# EAGLE board GNSS_Chip_Antenna_Evaluation_Board-Panel (EAGLE 9.3.0)
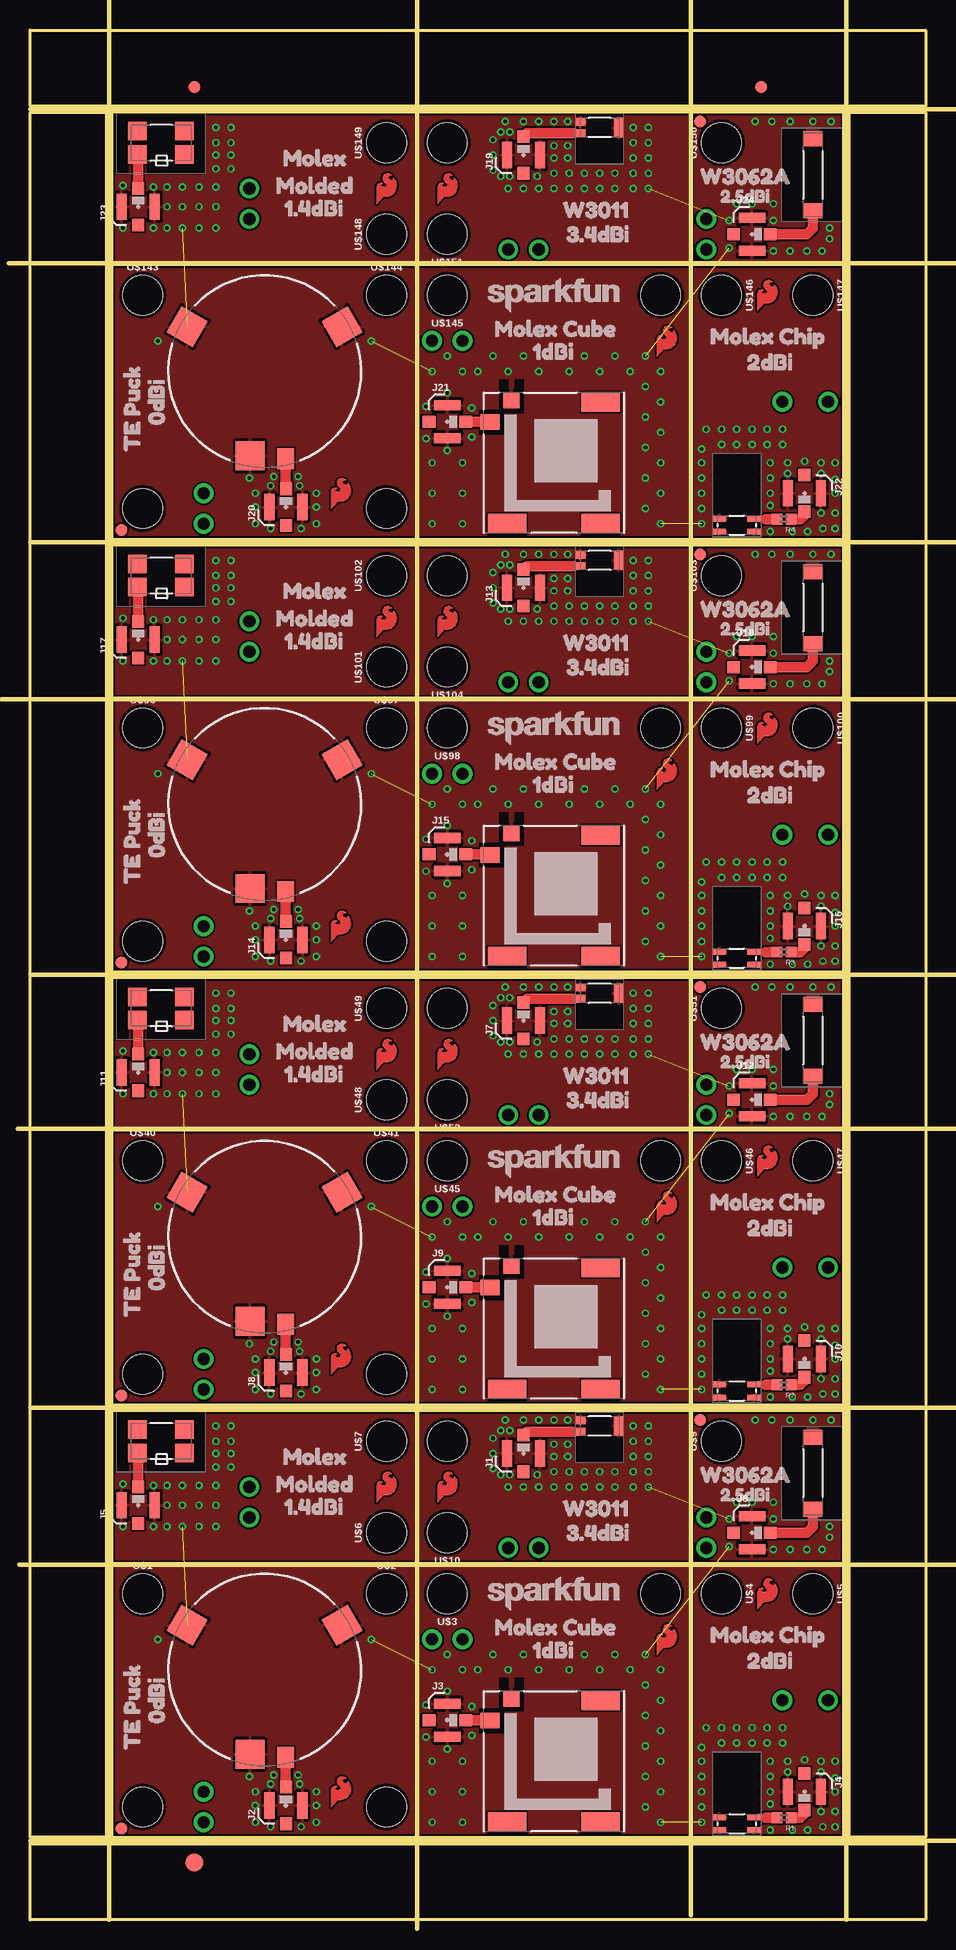
[diagram p0: board, top side]
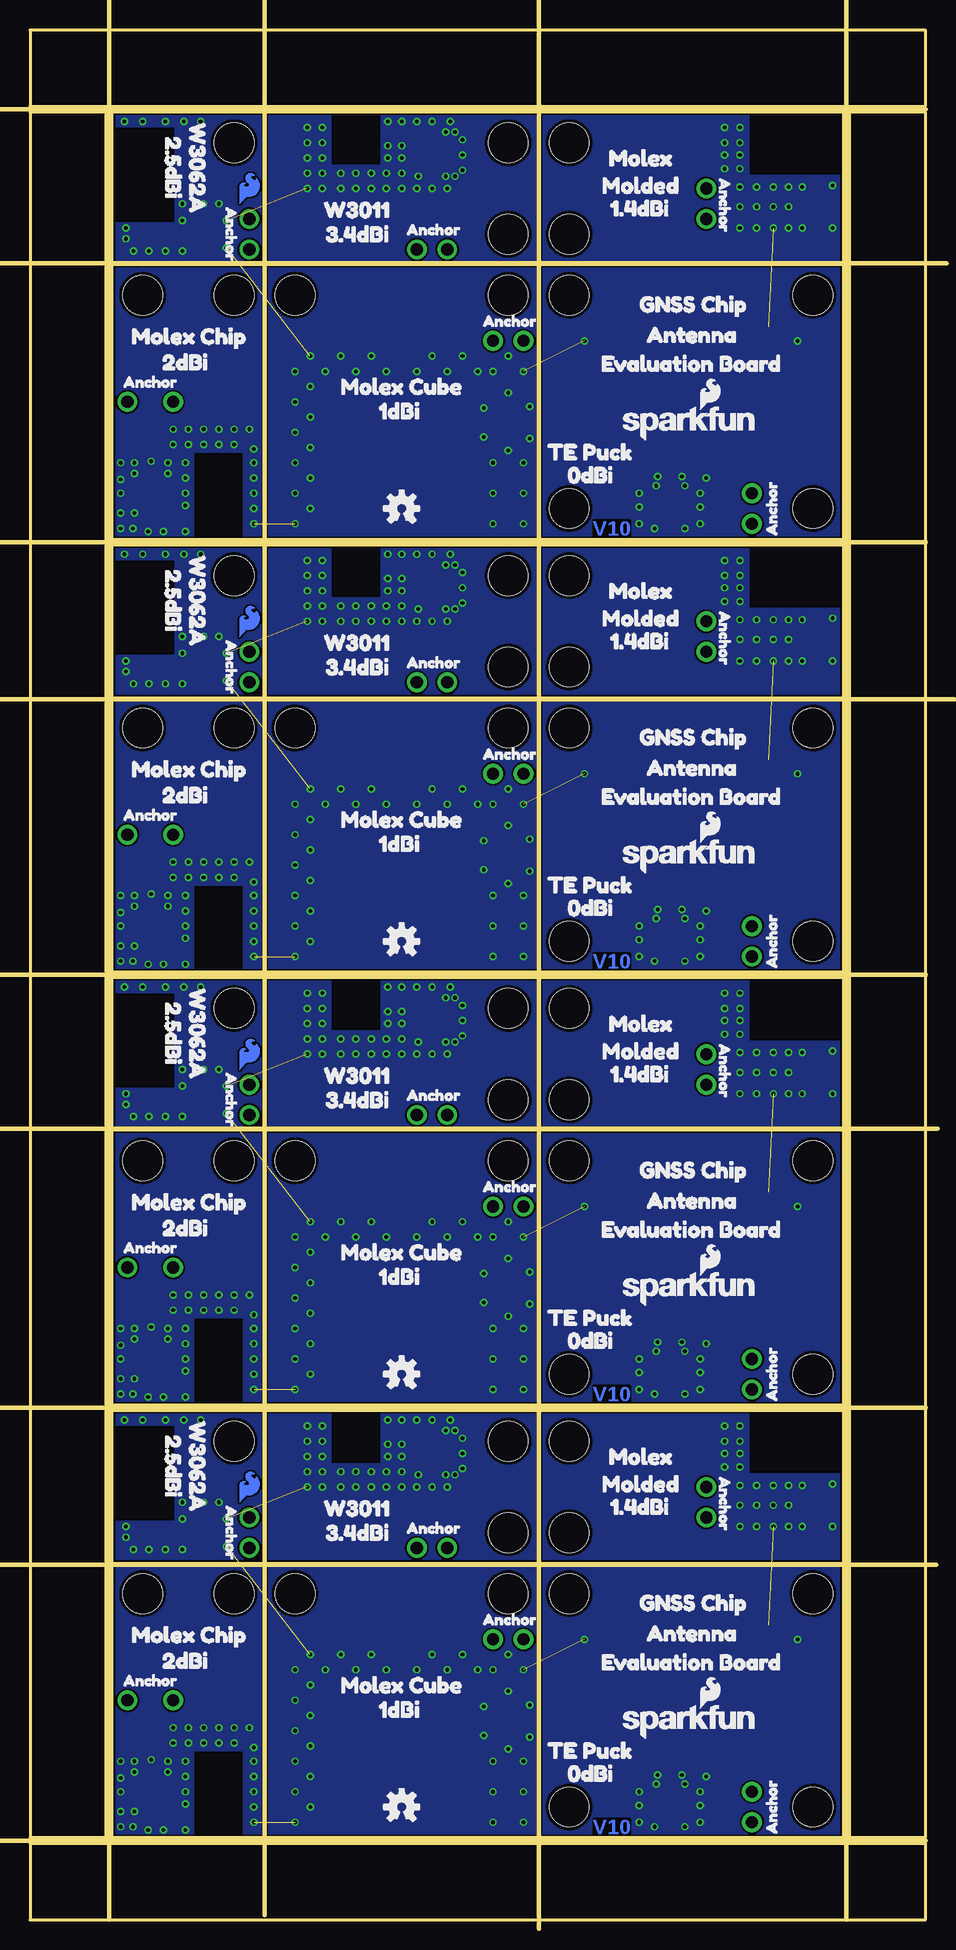
[diagram p1: board, bottom side, seen from below]

Size 74.68 x 157.48 mm. Coordinates in mm from the lower left corner, seen from the top.
Outline: 32.26,42.42 32.26,6.86
Outline: 55.12,42.42 55.12,6.86
Outline: 6.86,29.72 67.82,29.72
Outline: 32.26,78.49 32.26,42.93
Outline: 55.12,78.49 55.12,42.93
Outline: 6.86,65.79 67.82,65.79
Outline: 32.26,114.55 32.26,78.99
Outline: 55.12,114.55 55.12,78.99
Outline: 6.86,101.85 67.82,101.85
Outline: 32.26,150.62 32.26,115.06
Outline: 55.12,150.62 55.12,115.06
Outline: 6.86,137.92 67.82,137.92
Outline: 6.86,42.42 67.82,42.42 67.82,6.86 6.86,6.86 6.86,42.42
Outline: 6.86,78.49 67.82,78.49 67.82,42.93 6.86,42.93 6.86,78.49
Outline: 6.86,114.55 67.82,114.55 67.82,78.99 6.86,78.99 6.86,114.55
Outline: 6.86,150.62 67.82,150.62 67.82,115.06 6.86,115.06 6.86,150.62
Outline: 0,6.35 74.68,6.35 74.68,0 0,0 0,6.35
Outline: 68.33,150.62 74.68,150.62 74.68,6.86 68.33,6.86 68.33,150.62
Outline: 0,157.48 74.68,157.48 74.68,151.13 0,151.13 0,157.48
Outline: 0,150.62 6.35,150.62 6.35,6.86 0,6.86 0,150.62
Copper layers (1*16): Top 0.035mm / dielectric 1.5mm / Bottom 0.035mm
Design rules "SparkFun-2-layer-PCBWay-LIMIT": minimum track width 6mil, minimum drill 0.3mm, track to track 6mil, track to pad 6mil, pad to pad 6mil, via to via 6mil, smd to smd 6mil, copper to edge 6mil, drill to drill 6mil, minimum pad ring 6mil, minimum via ring 6mil, stop-mask expansion 4mil, vias tented up to drill 25mil, thermal gap 10mil
Milling: 13 lines

## Footprints (pad centres in the part's own frame; a part is rotated, then mirrored left to right if it is on the bottom)
FIDUCIAL-1X2 = smd 1 x 1: 1 0,0
FIDUCIAL-1.5X3 = smd 1.5 x 1.5: 1 0,0
U.FL = smd 2.2 x 0.85: 1 0,1.375; 2 0,-1.375 | smd 1.05 x 1: FEED 1.525,0; NC -1.525,0
STAND-OFF = hole 3.302: 0,0
0402 = smd 0.85 x 0.9: 1 -0.58,0; 2 0.58,0
TE_PUCK = smd 2.4 x 2.4: 1 -1.2,-7.03 | smd 2.5 x 2.5 rotated 60: 2 -6.443,3.72 | smd 2.5 x 2.5 rotated 300: 3 6.443,3.72 | smd 1.4 x 1.74: S 1.75,-7.28
MOLEX_GNSS_CUBE = smd 1.61 x 1.3: FEED 5.33,-3.4 | smd 1.3 x 1.32: GND 3.545,-5.2 | smd 3.2 x 1.6: NC1 -3.905,-5.06; NC2 -3.905,5.06; NC3 3.905,5.06
MOLEX_GNSS_CHIP = smd 1.1 x 0.5: 1 1.45,-0.55; 2 -1.45,-0.55; 3 -1.45,0.55; FEED 1.45,0.55
MLOEX_GNSS_MOLDED = smd 1.54 x 1.54: 1 -0.97,-1.95; 2 -0.97,1.95; 3 0.97,1.95; FEED 0.97,-1.95
W3062A = smd 1.25 x 1.61: FEED 3,0; GND -3,0
W3011 = smd 0.8 x 0.65: 1 1.6,0.475; 2 1.6,-0.475 | smd 0.8 x 1.6: 3 -1.6,0

## Placement (x,y rotation side)
E$1  [FIDUCIAL-1X2]  13.72,152.72 0 top
E$2  [FIDUCIAL-1X2]  60.96,152.72 0 top
E$3  [FIDUCIAL-1.5X3]  13.72,4.76 0 top
J1  U.FL  [U.FL]  41.15,38.86 90 top
J2  U.FL  [U.FL]  21.34,9.52 90 top
J3  U.FL  [U.FL]  34.8,16.64 0 top
J4  U.FL  [U.FL]  64.57,10.67 270 top
J5  U.FL  [U.FL]  9.02,34.54 90 top
J6  U.FL  [U.FL]  60.2,32.26 0 top
J7  U.FL  [U.FL]  41.15,74.93 90 top
J8  U.FL  [U.FL]  21.34,45.59 90 top
J9  U.FL  [U.FL]  34.8,52.7 0 top
J10  U.FL  [U.FL]  64.57,46.74 270 top
J11  U.FL  [U.FL]  9.02,70.61 90 top
J12  U.FL  [U.FL]  60.2,68.33 0 top
J13  U.FL  [U.FL]  41.15,111 90 top
J14  U.FL  [U.FL]  21.34,81.66 90 top
J15  U.FL  [U.FL]  34.8,88.77 0 top
J16  U.FL  [U.FL]  64.57,82.8 270 top
J17  U.FL  [U.FL]  9.02,106.68 90 top
J18  U.FL  [U.FL]  60.2,104.39 0 top
J19  U.FL  [U.FL]  41.15,147.07 90 top
J20  U.FL  [U.FL]  21.34,117.73 90 top
J21  U.FL  [U.FL]  34.8,124.84 0 top
J22  U.FL  [U.FL]  64.57,118.87 270 top
J23  U.FL  [U.FL]  9.02,142.75 90 top
J24  U.FL  [U.FL]  60.2,140.46 0 top
JP1  STAND-OFF  [STAND-OFF]  29.72,9.4 0 top
JP2  STAND-OFF  [STAND-OFF]  9.4,9.4 0 top
JP3  STAND-OFF  [STAND-OFF]  52.58,63.25 180 top
JP4  STAND-OFF  [STAND-OFF]  34.8,75.95 180 top
JP5  STAND-OFF  [STAND-OFF]  52.58,27.18 180 top
JP6  STAND-OFF  [STAND-OFF]  34.8,39.88 180 top
JP7  FIDUCIAL1X2  [FIDUCIAL-1X2]  55.88,77.72 0 top
JP8  FIDUCIAL1X2  [FIDUCIAL-1X2]  55.88,41.66 0 top
JP9  FIDUCIAL1X2  [FIDUCIAL-1X2]  7.62,7.62 0 top
JP10  FIDUCIAL1X2  [FIDUCIAL-1X2]  7.62,43.69 0 top
JP11  STAND-OFF  [STAND-OFF]  29.72,45.47 0 top
JP12  STAND-OFF  [STAND-OFF]  9.4,45.47 0 top
JP13  STAND-OFF  [STAND-OFF]  52.58,99.31 180 top
JP14  STAND-OFF  [STAND-OFF]  34.8,112.01 180 top
JP15  FIDUCIAL1X2  [FIDUCIAL-1X2]  55.88,113.79 0 top
JP16  FIDUCIAL1X2  [FIDUCIAL-1X2]  7.62,79.76 0 top
JP17  STAND-OFF  [STAND-OFF]  29.72,81.53 0 top
JP18  STAND-OFF  [STAND-OFF]  9.4,81.53 0 top
JP19  STAND-OFF  [STAND-OFF]  52.58,135.38 180 top
JP20  STAND-OFF  [STAND-OFF]  34.8,148.08 180 top
JP21  FIDUCIAL1X2  [FIDUCIAL-1X2]  55.88,149.86 0 top
JP22  FIDUCIAL1X2  [FIDUCIAL-1X2]  7.62,115.82 0 top
JP23  STAND-OFF  [STAND-OFF]  29.72,117.6 0 top
JP24  STAND-OFF  [STAND-OFF]  9.4,117.6 0 top
LOGO1  SFE_LOGO_FLAME.1EXP  [SFE_LOGO_FLAME_COPPER_EXPOSED_.1]  56.39,36.07 0 bottom
LOGO2  SFE_LOGO_FLAME.1EXP  [SFE_LOGO_FLAME_COPPER_EXPOSED_.1]  61.47,27.18 0 top
LOGO3  SFE_LOGO_FLAME.1EXP  [SFE_LOGO_FLAME_COPPER_EXPOSED_.1]  34.8,36.07 0 top
LOGO4  SFE_LOGO_FLAME.1EXP  [SFE_LOGO_FLAME_COPPER_EXPOSED_.1]  29.72,36.07 0 top
LOGO5  SFE_LOGO_FLAME.1EXP  [SFE_LOGO_FLAME_COPPER_EXPOSED_.1]  53.09,23.37 0 top
LOGO6  SFE_LOGO_FLAME.1EXP  [SFE_LOGO_FLAME_COPPER_EXPOSED_.1]  25.91,10.67 0 top
LOGO7  SFE_LOGO_FLAME.1EXP  [SFE_LOGO_FLAME_COPPER_EXPOSED_.1]  56.39,72.14 0 bottom
LOGO8  SFE_LOGO_FLAME.1EXP  [SFE_LOGO_FLAME_COPPER_EXPOSED_.1]  61.47,63.25 0 top
LOGO9  SFE_LOGO_FLAME.1EXP  [SFE_LOGO_FLAME_COPPER_EXPOSED_.1]  34.8,72.14 0 top
LOGO10  SFE_LOGO_FLAME.1EXP  [SFE_LOGO_FLAME_COPPER_EXPOSED_.1]  29.72,72.14 0 top
LOGO11  SFE_LOGO_FLAME.1EXP  [SFE_LOGO_FLAME_COPPER_EXPOSED_.1]  53.09,59.44 0 top
LOGO12  SFE_LOGO_FLAME.1EXP  [SFE_LOGO_FLAME_COPPER_EXPOSED_.1]  25.91,46.74 0 top
LOGO13  SFE_LOGO_FLAME.1EXP  [SFE_LOGO_FLAME_COPPER_EXPOSED_.1]  56.39,108.2 0 bottom
LOGO14  SFE_LOGO_FLAME.1EXP  [SFE_LOGO_FLAME_COPPER_EXPOSED_.1]  61.47,99.31 0 top
LOGO15  SFE_LOGO_FLAME.1EXP  [SFE_LOGO_FLAME_COPPER_EXPOSED_.1]  34.8,108.2 0 top
LOGO16  SFE_LOGO_FLAME.1EXP  [SFE_LOGO_FLAME_COPPER_EXPOSED_.1]  29.72,108.2 0 top
LOGO17  SFE_LOGO_FLAME.1EXP  [SFE_LOGO_FLAME_COPPER_EXPOSED_.1]  53.09,95.5 0 top
LOGO18  SFE_LOGO_FLAME.1EXP  [SFE_LOGO_FLAME_COPPER_EXPOSED_.1]  25.91,82.8 0 top
LOGO19  SFE_LOGO_FLAME.1EXP  [SFE_LOGO_FLAME_COPPER_EXPOSED_.1]  56.39,144.27 0 bottom
LOGO20  SFE_LOGO_FLAME.1EXP  [SFE_LOGO_FLAME_COPPER_EXPOSED_.1]  61.47,135.38 0 top
LOGO21  SFE_LOGO_FLAME.1EXP  [SFE_LOGO_FLAME_COPPER_EXPOSED_.1]  34.8,144.27 0 top
LOGO22  SFE_LOGO_FLAME.1EXP  [SFE_LOGO_FLAME_COPPER_EXPOSED_.1]  29.72,144.27 0 top
LOGO23  SFE_LOGO_FLAME.1EXP  [SFE_LOGO_FLAME_COPPER_EXPOSED_.1]  53.09,131.57 0 top
LOGO24  SFE_LOGO_FLAME.1EXP  [SFE_LOGO_FLAME_COPPER_EXPOSED_.1]  25.91,118.87 0 top
R1  0  [0402]  62.86,8.51 180 top
R2  0  [0402]  62.86,44.58 180 top
R3  0  [0402]  62.86,80.65 180 top
R4  0  [0402]  62.86,116.71 180 top
U$1  [STAND-OFF]  9.4,27.18 0 top
U$2  [STAND-OFF]  29.72,27.18 0 top
U$3  [STAND-OFF]  34.8,27.18 180 top
U$4  [STAND-OFF]  57.66,27.18 270 top
U$5  [STAND-OFF]  65.28,27.18 270 top
U$6  [STAND-OFF]  29.72,32.26 90 top
U$7  [STAND-OFF]  29.72,39.88 90 top
U$8  [ANCHOR0]  16.76,37.72 270 bottom
U$9  [STAND-OFF]  57.66,39.88 90 top
U$10  [STAND-OFF]  34.8,32.26 180 top
U$11  [3#4DBI2]  43.56,32.26 0 top
U$12  [0DBI0]  10.54,15.24 90 top
U$13  [TE_PUCK7]  32.64,14.1 0 bottom
U$14  [1#4DBI3]  20.07,34.42 0 top
U$15  [1DBI1]  40.77,22.48 0 top
U$16  OSHW-LOGOS  [OSHW-LOGO-S]  43.69,9.4 0 bottom
U$17  OSHW-LOGOS  [OSHW-LOGO-S]  43.69,45.47 0 bottom
U$18  [2DBI2]  58.67,21.59 0 top
U$19  [MOLEX_CHIP5]  55.63,23.75 0 top
U$20  [MOLEX_CHIP5]  67.31,23.75 0 bottom
U$21  [MOLEX0]  27.56,38.61 0 bottom
U$22  [MOLEX0]  19.94,38.61 0 top
U$23  [SFE_LOGO_NAME_.1]  43.69,27.18 0 top
U$24  [ANCHOR0]  12.83,6.35 90 bottom
U$25  [ANCHOR0]  37.72,25.02 0 bottom
U$26  [ANCHOR0]  44.07,32.64 0 bottom
U$27  [ANCHOR0]  67.69,19.94 0 bottom
U$28  [ANCHOR0]  57.91,35.31 270 bottom
U$29  [MOLDED1]  19.18,36.32 0 top
U$30  [MOLDED1]  28.32,36.32 0 bottom
U$31  [MOLEX_CUBE6]  49.91,19.56 0 bottom
U$32  [1#4DBI3]  27.43,34.42 0 bottom
U$33  [W30112]  51.31,34.29 0 bottom
U$34  [3#4DBI2]  51.18,32.26 0 bottom
U$35  [W3062A3]  60.71,42.67 270 bottom
U$36  [2#5DBI4]  62.74,41.53 270 bottom
U$37  [SFE_LOGO_NAME_FLAME_.1]  19.68,16.51 0 bottom
U$38  [2DBI2]  64.77,21.59 0 bottom
U$39  [1DBI1]  46.74,17.53 0 bottom
U$40  [STAND-OFF]  9.4,63.25 0 top
U$41  [STAND-OFF]  29.72,63.25 0 top
U$42  [0DBI0]  30.99,12.19 0 bottom
U$43  [ANTENNA10]  24.38,23.88 0 bottom
U$44  [2#5DBI2]  56.64,35.43 0 top
U$45  [STAND-OFF]  34.8,63.25 180 top
U$46  [STAND-OFF]  57.66,63.25 270 top
U$47  [STAND-OFF]  65.28,63.25 270 top
U$48  [STAND-OFF]  29.72,68.33 90 top
U$49  [STAND-OFF]  29.72,75.95 90 top
U$50  [EVALUATION_BOARD15]  28.19,21.46 0 bottom
U$51  [STAND-OFF]  57.66,75.95 90 top
U$52  [GNSS_CHIP13]  25.02,26.42 0 bottom
U$53  [STAND-OFF]  34.8,68.33 180 top
U$54  [3#4DBI2]  43.56,68.33 0 top
U$55  [0DBI0]  10.54,51.31 90 top
U$56  [MOLEX_CUBE6]  37.59,24.38 0 top
U$57  [TE_PUCK7]  8.51,13.08 90 top
U$58  [W3062A3]  54.74,37.08 0 top
U$59  [W30112]  43.31,34.29 0 top
U$60  [1#4DBI3]  20.07,70.48 0 top
U$61  [1DBI1]  40.77,58.55 0 top
U$62  [2DBI2]  58.67,57.66 0 top
U$63  [ANCHOR0]  16.76,73.79 270 bottom
U$64  [ANCHOR0]  12.83,42.42 90 bottom
U$65  [ANCHOR0]  37.72,61.09 0 bottom
U$66  [ANCHOR0]  44.07,68.71 0 bottom
U$67  [ANCHOR0]  67.69,56.01 0 bottom
U$68  [ANCHOR0]  57.91,71.37 270 bottom
U$69  [1#4DBI3]  27.43,70.48 0 bottom
U$70  [3#4DBI2]  51.18,68.33 0 bottom
U$71  [2#5DBI4]  62.74,77.6 270 bottom
U$72  [2DBI2]  64.77,57.66 0 bottom
U$73  [1DBI1]  46.74,53.59 0 bottom
U$74  [0DBI0]  30.99,48.26 0 bottom
U$75  [2#5DBI2]  56.64,71.5 0 top
U$76  [SFE_LOGO_NAME_.1]  43.69,63.25 0 top
U$77  [ANTENNA10]  24.38,59.94 0 bottom
U$78  [EVALUATION_BOARD15]  28.19,57.53 0 bottom
U$79  [GNSS_CHIP13]  25.02,62.48 0 bottom
U$80  [MOLEX_CUBE6]  37.59,60.45 0 top
U$81  [TE_PUCK7]  8.51,49.15 90 top
U$82  [W3062A3]  54.74,73.15 0 top
U$83  [W30112]  43.31,70.36 0 top
U$84  [TE_PUCK7]  32.64,50.16 0 bottom
U$85  [MOLEX_CHIP5]  55.63,59.82 0 top
U$86  [MOLEX_CHIP5]  67.31,59.82 0 bottom
U$87  [MOLEX0]  19.94,74.68 0 top
U$88  [MOLDED1]  19.18,72.39 0 top
U$89  [MOLEX0]  27.56,74.68 0 bottom
U$90  [MOLDED1]  28.32,72.39 0 bottom
U$91  [MOLEX_CUBE6]  49.91,55.63 0 bottom
U$92  [W30112]  51.31,70.36 0 bottom
U$93  [W3062A3]  60.71,78.74 270 bottom
U$94  [SFE_LOGO_NAME_FLAME_.1]  19.68,52.58 0 bottom
U$95  OSHW-LOGOS  [OSHW-LOGO-S]  43.69,81.53 0 bottom
U$96  [STAND-OFF]  9.4,99.31 0 top
U$97  [STAND-OFF]  29.72,99.31 0 top
U$98  [STAND-OFF]  34.8,99.31 180 top
U$99  [STAND-OFF]  57.66,99.31 270 top
U$100  [STAND-OFF]  65.28,99.31 270 top
U$101  [STAND-OFF]  29.72,104.39 90 top
U$102  [STAND-OFF]  29.72,112.01 90 top
U$103  [STAND-OFF]  57.66,112.01 90 top
U$104  [STAND-OFF]  34.8,104.39 180 top
U$105  [3#4DBI2]  43.56,104.39 0 top
U$106  [0DBI0]  10.54,87.38 90 top
U$107  [1#4DBI3]  20.07,106.55 0 top
U$108  [1DBI1]  40.77,94.62 0 top
U$109  [2DBI2]  58.67,93.73 0 top
U$110  [ANCHOR0]  16.76,109.86 270 bottom
U$111  [ANCHOR0]  12.83,78.49 90 bottom
U$112  [ANCHOR0]  37.72,97.16 0 bottom
U$113  [ANCHOR0]  44.07,104.78 0 bottom
U$114  [ANCHOR0]  67.69,92.08 0 bottom
U$115  [ANCHOR0]  57.91,107.44 270 bottom
U$116  [1#4DBI3]  27.43,106.55 0 bottom
U$117  [3#4DBI2]  51.18,104.39 0 bottom
U$118  [2#5DBI4]  62.74,113.67 270 bottom
U$119  [2DBI2]  64.77,93.73 0 bottom
U$120  [1DBI1]  46.74,89.66 0 bottom
U$121  [0DBI0]  30.99,84.33 0 bottom
U$122  [2#5DBI2]  56.64,107.57 0 top
U$123  [SFE_LOGO_NAME_.1]  43.69,99.31 0 top
U$124  [ANTENNA10]  24.38,96.01 0 bottom
U$125  [EVALUATION_BOARD15]  28.19,93.6 0 bottom
U$126  [GNSS_CHIP13]  25.02,98.55 0 bottom
U$127  [MOLEX_CUBE6]  37.59,96.52 0 top
U$128  [TE_PUCK7]  8.51,85.22 90 top
U$129  [W3062A3]  54.74,109.22 0 top
U$130  [W30112]  43.31,106.43 0 top
U$131  [TE_PUCK7]  32.64,86.23 0 bottom
U$132  [MOLEX_CHIP5]  55.63,95.89 0 top
U$133  [MOLEX_CHIP5]  67.31,95.89 0 bottom
U$134  [MOLEX0]  19.94,110.74 0 top
U$135  [MOLDED1]  19.18,108.46 0 top
U$136  [MOLEX0]  27.56,110.74 0 bottom
U$137  [MOLDED1]  28.32,108.46 0 bottom
U$138  [MOLEX_CUBE6]  49.91,91.69 0 bottom
U$139  [W30112]  51.31,106.43 0 bottom
U$140  [W3062A3]  60.71,114.81 270 bottom
U$141  [SFE_LOGO_NAME_FLAME_.1]  19.68,88.65 0 bottom
U$142  OSHW-LOGOS  [OSHW-LOGO-S]  43.69,117.6 0 bottom
U$143  [STAND-OFF]  9.4,135.38 0 top
U$144  [STAND-OFF]  29.72,135.38 0 top
U$145  [STAND-OFF]  34.8,135.38 180 top
U$146  [STAND-OFF]  57.66,135.38 270 top
U$147  [STAND-OFF]  65.28,135.38 270 top
U$148  [STAND-OFF]  29.72,140.46 90 top
U$149  [STAND-OFF]  29.72,148.08 90 top
U$150  [STAND-OFF]  57.66,148.08 90 top
U$151  [STAND-OFF]  34.8,140.46 180 top
U$152  [3#4DBI2]  43.56,140.46 0 top
U$153  [0DBI0]  10.54,123.44 90 top
U$154  [1#4DBI3]  20.07,142.62 0 top
U$155  [1DBI1]  40.77,130.68 0 top
U$156  [2DBI2]  58.67,129.79 0 top
U$157  [ANCHOR0]  16.76,145.92 270 bottom
U$158  [ANCHOR0]  12.83,114.55 90 bottom
U$159  [ANCHOR0]  37.72,133.22 0 bottom
U$160  [ANCHOR0]  44.07,140.84 0 bottom
U$161  [ANCHOR0]  67.69,128.14 0 bottom
U$162  [ANCHOR0]  57.91,143.51 270 bottom
U$163  [1#4DBI3]  27.43,142.62 0 bottom
U$164  [3#4DBI2]  51.18,140.46 0 bottom
U$165  [2#5DBI4]  62.74,149.73 270 bottom
U$166  [2DBI2]  64.77,129.79 0 bottom
U$167  [1DBI1]  46.74,125.73 0 bottom
U$168  [0DBI0]  30.99,120.4 0 bottom
U$169  [2#5DBI2]  56.64,143.64 0 top
U$170  [SFE_LOGO_NAME_.1]  43.69,135.38 0 top
U$171  [ANTENNA10]  24.38,132.08 0 bottom
U$172  [EVALUATION_BOARD15]  28.19,129.67 0 bottom
U$173  [GNSS_CHIP13]  25.02,134.62 0 bottom
U$174  [MOLEX_CUBE6]  37.59,132.59 0 top
U$175  [TE_PUCK7]  8.51,121.29 90 top
U$176  [W3062A3]  54.74,145.29 0 top
U$177  [W30112]  43.31,142.49 0 top
U$178  [TE_PUCK7]  32.64,122.3 0 bottom
U$179  [MOLEX_CHIP5]  55.63,131.95 0 top
U$180  [MOLEX_CHIP5]  67.31,131.95 0 bottom
U$181  [MOLEX0]  19.94,146.81 0 top
U$182  [MOLDED1]  19.18,144.53 0 top
U$183  [MOLEX0]  27.56,146.81 0 bottom
U$184  [MOLDED1]  28.32,144.53 0 bottom
U$185  [MOLEX_CUBE6]  49.91,127.76 0 bottom
U$186  [W30112]  51.31,142.49 0 bottom
U$187  [W3062A3]  60.71,150.88 270 bottom
U$188  [SFE_LOGO_NAME_FLAME_.1]  19.68,124.71 0 bottom
Y1  PUCK  [TE_PUCK]  19.56,56.9 0 top
Y2  PUCK  [TE_PUCK]  19.56,20.83 0 top
Y3  CUBE  [MOLEX_GNSS_CUBE]  43.69,13.21 180 top
Y4  CHIP  [MOLEX_GNSS_CHIP]  58.93,8 0 top
Y5  MOLDED  [MLOEX_GNSS_MOLDED]  10.92,39.88 270 top
Y6  W3062A  [W3062A]  65.28,37.21 270 top
Y7  W3011  [W3011]  47.5,41.15 180 top
Y8  CUBE  [MOLEX_GNSS_CUBE]  43.69,49.28 180 top
Y9  CHIP  [MOLEX_GNSS_CHIP]  58.93,44.07 0 top
Y10  MOLDED  [MLOEX_GNSS_MOLDED]  10.92,75.95 270 top
Y11  W3062A  [W3062A]  65.28,73.28 270 top
Y12  W3011  [W3011]  47.5,77.22 180 top
Y13  PUCK  [TE_PUCK]  19.56,92.96 0 top
Y14  CUBE  [MOLEX_GNSS_CUBE]  43.69,85.34 180 top
Y15  CHIP  [MOLEX_GNSS_CHIP]  58.93,80.14 0 top
Y16  MOLDED  [MLOEX_GNSS_MOLDED]  10.92,112.01 270 top
Y17  W3062A  [W3062A]  65.28,109.35 270 top
Y18  W3011  [W3011]  47.5,113.28 180 top
Y19  PUCK  [TE_PUCK]  19.56,129.03 0 top
Y20  CUBE  [MOLEX_GNSS_CUBE]  43.69,121.41 180 top
Y21  CHIP  [MOLEX_GNSS_CHIP]  58.93,116.2 0 top
Y22  MOLDED  [MLOEX_GNSS_MOLDED]  10.92,148.08 270 top
Y23  W3062A  [W3062A]  65.28,145.41 270 top
Y24  W3011  [W3011]  47.5,149.35 180 top

## Library data of the parts
E$1 E$2 LOGO1-LOGO24 U$16 U$17 U$23 U$37 U$76 U$94 U$95 U$123 U$141 U$142 U$170 U$188 = SparkFun-Aesthetics
E$3 = SparkFun-Retired
J1-J24 = SparkFun-Connectors; PROD_ID: CONN-09193; SF_ID: WRL-09144
JP1-JP24 = SparkFun
R1-R4 = SparkFun-Resistors; PROD_ID: RES-14244
U$1-U$7 U$9 U$10 U$40 U$41 U$45-U$49 U$51 U$53 U$96-U$104 U$143-U$151 = SparkFun-Hardware
U$8 U$24-U$28 U$63-U$68 U$110-U$115 U$157-U$162 = buzzard_labels (60)
U$11 U$34 U$54 U$70 U$105 U$117 U$152 U$164 = buzzard_labels (13)
U$12 U$14 U$15 U$18 U$32 U$36 U$38 U$39 U$42 U$55 U$60-U$62 U$69 U$71-U$74 U$106-U$109 U$116 U$118-U$121 U$153-U$156 U$163 U$165-U$168 = buzzard_labels (14)
U$13 U$19-U$22 U$29-U$31 U$33 U$35 U$43 U$50 U$52 U$56-U$59 U$77-U$93 U$124-U$140 U$171-U$187 = buzzard_labels (1)
U$44 U$75 U$122 U$169 = buzzard_labels (61)
Y1 Y2 Y13 Y19 = SparkFun-GPS; PROD_ID: ANT-14308
Y3 Y8 Y14 Y20 = SparkFun-GPS; PROD_ID: ANT-14307
Y4 Y9 Y15 Y21 = SparkFun-GPS; PROD_ID: ANT-14306
Y5 Y10 Y16 Y22 = SparkFun-GPS; PROD_ID: ANT-14303
Y6 Y11 Y17 Y23 = SparkFun-GPS; PROD_ID: ANT-14305
Y7 Y12 Y18 Y24 = SparkFun-GPS; PROD_ID: ANT-14304

## Nets
FEED1: J1.FEED Y7.1
FEED2: J5.FEED Y5.FEED
FEED3: J2.FEED Y2.S
FEED4: J3.FEED Y3.FEED
FEED5: J4.FEED R1.1
FEED6: J6.FEED Y6.FEED
FEED7: J7.FEED Y12.1
FEED8: J8.FEED Y1.S
FEED9: J9.FEED Y8.FEED
FEED10: J10.FEED R2.1
FEED11: J11.FEED Y10.FEED
FEED12: J12.FEED Y11.FEED
FEED13: J13.FEED Y18.1
FEED14: J14.FEED Y13.S
FEED15: J15.FEED Y14.FEED
FEED16: J16.FEED R3.1
FEED17: J17.FEED Y16.FEED
FEED18: J18.FEED Y17.FEED
FEED19: J19.FEED Y24.1
FEED20: J20.FEED Y19.S
FEED21: J21.FEED Y20.FEED
FEED22: J22.FEED R4.1
FEED23: J23.FEED Y22.FEED
FEED24: J24.FEED Y23.FEED
GND: J1.1 J1.2 J2.1 J2.2 J3.1 J3.2 J4.1 J4.2 J5.1 J5.2 J6.1 J6.2 Y2.1 Y2.2 Y2.3 Y3.GND Y4.1 Y4.2 Y4.3 Y6.GND Y7.2 Y7.3
GND1: J7.1 J7.2 J8.1 J8.2 J9.1 J9.2 J10.1 J10.2 J11.1 J11.2 J12.1 J12.2 Y1.1 Y1.2 Y1.3 Y8.GND Y9.1 Y9.2 Y9.3 Y11.GND Y12.2 Y12.3
GND2: J13.1 J13.2 J14.1 J14.2 J15.1 J15.2 J16.1 J16.2 J17.1 J17.2 J18.1 J18.2 Y13.1 Y13.2 Y13.3 Y14.GND Y15.1 Y15.2 Y15.3 Y17.GND Y18.2 Y18.3
GND3: J19.1 J19.2 J20.1 J20.2 J21.1 J21.2 J22.1 J22.2 J23.1 J23.2 J24.1 J24.2 Y19.1 Y19.2 Y19.3 Y20.GND Y21.1 Y21.2 Y21.3 Y23.GND Y24.2 Y24.3
N$2: R2.2 Y9.FEED
N$5: R1.2 Y4.FEED
N$25: R3.2 Y15.FEED
N$37: R4.2 Y21.FEED

## Tracks (layer width: path | path; a pad name or v marks a point on that pad's centre or on a via)
A1  (via drill 1.02 pad 1.65)
  other vias: 18.29,36.07
A2  (via drill 1.02 pad 1.65)
  other vias: 18.29,72.14
A3  (via drill 1.02 pad 1.65)
  other vias: 18.29,108.2
A4  (via drill 1.02 pad 1.65)
  other vias: 18.29,144.27
FEED1
  Top 0.152: 45.65,40.67 Y7.1 45.24,40.67
  Top 0.879: J1.FEED 41.43,40.67 45.24,40.67
FEED2
  Top 0.203: Y5.FEED 9.02,38.86 | 9.02,38.86 | J5.FEED
  Top 0.879: J5.FEED 9.02,38.86
FEED3
  Top 0.879: J2.FEED 21.31,11.08 Y2.S
FEED4
  Top 0.203: Y3.FEED 38.33,16.64 38.22,16.64
  Top 0.879: J3.FEED 38.22,16.64
FEED5
  Top 0.879: R1.1 64.24,8.51 64.57,8.84 J4.FEED
FEED6
  Top 0.879: J6.FEED 64.77,32.26 65.28,32.77 Y6.FEED
FEED7
  Top 0.152: 45.65,76.74 Y12.1 45.24,76.74
  Top 0.879: J7.FEED 41.43,76.74 45.24,76.74
FEED8
  Top 0.879: J8.FEED 21.31,47.15 Y1.S
FEED9
  Top 0.203: Y8.FEED 38.33,52.7 38.22,52.7
  Top 0.879: J9.FEED 38.22,52.7
FEED10
  Top 0.879: R2.1 64.24,44.58 64.57,44.91 J10.FEED
FEED11
  Top 0.203: Y10.FEED 9.02,74.93 | 9.02,74.93 | J11.FEED
  Top 0.879: J11.FEED 9.02,74.93
FEED12
  Top 0.879: J12.FEED 64.77,68.33 65.28,68.83 Y11.FEED
FEED13
  Top 0.152: 45.65,112.81 Y18.1 45.24,112.81
  Top 0.879: J13.FEED 41.43,112.81 45.24,112.81
FEED14
  Top 0.879: J14.FEED 21.31,83.21 Y13.S
FEED15
  Top 0.203: Y14.FEED 38.33,88.77 38.22,88.77
  Top 0.879: J15.FEED 38.22,88.77
FEED16
  Top 0.879: R3.1 64.24,80.65 64.57,80.98 J16.FEED
FEED17
  Top 0.203: Y16.FEED 9.02,111 | 9.02,111 | J17.FEED
  Top 0.879: J17.FEED 9.02,111
FEED18
  Top 0.879: J18.FEED 64.77,104.39 65.28,104.9 Y17.FEED
FEED19
  Top 0.152: 45.65,148.88 Y24.1 45.24,148.88
  Top 0.879: J19.FEED 41.43,148.88 45.24,148.88
FEED20
  Top 0.879: J20.FEED 21.31,119.28 Y19.S
FEED21
  Top 0.203: Y20.FEED 38.33,124.84 38.22,124.84
  Top 0.879: J21.FEED 38.22,124.84
FEED22
  Top 0.879: R4.1 64.24,116.71 64.57,117.05 J22.FEED
FEED23
  Top 0.203: Y22.FEED 9.02,147.07 | 9.02,147.07 | J23.FEED
  Top 0.879: J23.FEED 9.02,147.07
FEED24
  Top 0.879: J24.FEED 64.77,140.46 65.28,140.97 Y23.FEED
GND  (via drill 0.3)  (5 unrouted)
  other vias: 50.29,41.15 50.29,39.88 50.29,38.61 50.29,37.34 50.29,36.07 48.77,37.34 47.5,37.34 48.77,36.07 46.23,37.34 44.96,37.34 43.69,37.34 42.29,37.08 41.15,36.07 39.88,36.07 40,37.08 39.24,37.08 44.83,38.61 43.69,38.61 44.83,39.62 43.69,39.62 44.83,41.66 43.69,41.66 42.42,41.66 41.15,41.66 40,40.77 39.24,40.77 18.8,10.67 18.8,8.13 20.07,7.75 20.07,11.3 20.32,12.06 22.35,12.06 22.48,11.3 23.88,9.52 18.8,9.52 23.88,10.67 23.88,8.13 22.61,7.75 42.42,20.83 44.96,20.83 47.5,20.83 50.04,20.83 52.58,20.83 52.58,18.29 52.58,15.75 52.58,13.21 52.58,10.67 52.58,8.13 39.88,20.83 37.34,20.83 36.07,20.83 33.53,13.21 36.07,13.21 36.07,10.67 33.53,10.67 33.53,8.13 36.07,8.13 36.83,17.78 36.83,15.37 33.02,15.24 33.02,17.91 34.8,19.05 34.8,14.22 56.01,8.13 56.01,9.4 56.01,10.67 56.01,11.94 56.01,13.21 56.01,14.35 57.66,14.73 58.93,14.73 60.2,14.73 61.47,14.73 61.72,13.21 61.72,11.94 61.72,10.67 61.72,9.65 63.18,12.32 65.97,12.32 67.11,10.67 65.97,9.02 67.11,9.02 67.11,11.81 61.72,7.49 63.56,7.49 64.83,7.49 66.1,7.75 67.11,7.75 63.18,13.21 64.57,13.34 65.97,13.21 67.11,13.21 7.75,32.77 39.62,41.66 10.29,32.77 10.29,36.2 7.75,36.32 11.43,34.54 11.43,32.77 11.43,36.2 12.7,36.2 14.1,36.2 15.49,36.2 15.49,37.72 15.49,39.88 15.49,41.15 12.7,34.54 14.1,34.54 15.49,34.54 12.7,32.77 14.1,32.77 15.49,32.77 15.49,38.86 16.76,41.15 16.76,39.88 16.76,38.86 16.76,37.72 10.67,23.37 28.45,23.37 18.29,11.94 51.31,19.56 51.31,17.02 51.31,14.48 51.31,11.94 51.31,9.4 48.77,22.1 46.23,22.1 41.15,22.1 38.61,22.1 34.8,22.1 51.31,22.1 57.66,16 58.93,16 60.2,16 61.47,16 56.39,16 62.74,16 62.74,14.73 47.5,36.07 46.23,36.07 44.96,36.07 43.69,36.07 42.42,36.07 51.56,36.07 51.56,37.34 51.56,38.61 51.56,39.88 51.56,41.15 38.61,38.86 38.61,40.13 38.61,37.59 61.98,30.86 61.98,33.4 60.2,34.8 61.98,34.8 58.93,34.8 58.29,33.4 58.29,31.12 63.37,30.86 64.77,30.86 66.04,30.86 66.67,31.88 66.67,32.77 66.8,41.66 65.28,41.66 63.37,41.66 61.85,41.66 60.45,41.66 33.53,20.83
  pour Top (rank 2): 55.12,29.72 32.26,29.72 32.26,42.42 55.12,42.42
  pour Bottom (rank 2): 55.12,29.72 32.26,29.72 32.26,42.42 55.12,42.42
  pour Top (no thermals): 48.89,40.39 49.53,40.39 49.53,39.88 50.42,39.88 50.42,42.42 49.53,42.42 49.53,41.91 48.89,41.91
  pour Top (no thermals): 46.1,41.38 45.08,41.38 45.08,42.16 45.47,42.16 45.47,41.86 46.1,41.86
  pour Top: 6.86,29.72 32.26,29.72 32.26,6.86 6.86,6.86
  pour Bottom: 6.86,29.72 32.26,29.72 32.26,6.86 6.86,6.86
  pour Bottom: 55.12,6.86 32.26,6.86 32.26,29.72 55.12,29.72
  pour Top: 55.12,6.86 32.26,6.86 32.26,29.72 55.12,29.72
  pour Top: 55.12,29.72 67.82,29.72 67.82,6.86 55.12,6.86
  pour Bottom: 55.12,29.72 67.82,29.72 67.82,6.86 55.12,6.86
  pour Top (no thermals): 57.12,8.76 56.91,8.76 56.91,9.16 56.32,9.16 56.32,8.06 56.91,8.06 56.91,8.36 57.12,8.36
  pour Top (no thermals): 57.08,7.66 56.91,7.66 56.91,8.05 56.26,8.05 56.26,6.96 56.91,6.96 56.91,7.26 57.08,7.26
  pour Bottom: 6.86,29.72 6.86,42.42 32.26,42.42 32.26,29.72
  pour Top: 6.86,29.72 6.86,42.42 32.26,42.42 32.26,29.72
  pour Top: 55.12,29.72 55.12,42.42 67.82,42.42 67.82,29.72
  pour Bottom: 55.12,29.72 55.12,42.42 67.82,42.42 67.82,29.72
  pour Top (no thermals): 60.91,7.66 60.91,7.86 61.66,7.86 61.66,7.06 60.91,7.06 60.91,7.21 60.56,7.21 60.56,7.66
  pour Top (no thermals): 64.42,41.16 64.72,41.16 64.72,40.56 65.82,40.56 65.82,41.16 66.22,41.16 66.22,41.36 64.42,41.36
GND1  (via drill 0.3)  (5 unrouted)
  other vias: 50.29,77.22 50.29,75.95 50.29,74.68 50.29,73.41 50.29,72.14 48.77,73.41 47.5,73.41 48.77,72.14 46.23,73.41 44.96,73.41 43.69,73.41 42.29,73.15 41.15,72.14 39.88,72.14 40,73.15 39.24,73.15 44.83,74.68 43.69,74.68 44.83,75.69 43.69,75.69 44.83,77.72 43.69,77.72 42.42,77.72 41.15,77.72 40,76.84 39.24,76.84 18.8,46.74 18.8,44.2 20.07,43.81 20.07,47.37 20.32,48.13 22.35,48.13 22.48,47.37 23.88,45.59 18.8,45.59 23.88,46.74 23.88,44.2 22.61,43.81 42.42,56.9 44.96,56.9 47.5,56.9 50.04,56.9 52.58,56.9 52.58,54.36 52.58,51.82 52.58,49.28 52.58,46.74 52.58,44.2 39.88,56.9 37.34,56.9 36.07,56.9 33.53,49.28 36.07,49.28 36.07,46.74 33.53,46.74 33.53,44.2 36.07,44.2 36.83,53.85 36.83,51.43 33.02,51.31 33.02,53.97 34.8,55.12 34.8,50.29 56.01,44.2 56.01,45.47 56.01,46.74 56.01,48.01 56.01,49.28 56.01,50.42 57.66,50.8 58.93,50.8 60.2,50.8 61.47,50.8 61.72,49.28 61.72,48.01 61.72,46.74 61.72,45.72 63.18,48.39 65.97,48.39 67.11,46.74 65.97,45.08 67.11,45.08 67.11,47.88 61.72,43.56 63.56,43.56 64.83,43.56 66.1,43.81 67.11,43.81 63.18,49.28 64.57,49.4 65.97,49.28 67.11,49.28 7.75,68.83 39.62,77.72 10.29,68.83 10.29,72.26 7.75,72.39 11.43,70.61 11.43,68.83 11.43,72.26 12.7,72.26 14.1,72.26 15.49,72.26 15.49,73.79 15.49,75.95 15.49,77.22 12.7,70.61 14.1,70.61 15.49,70.61 12.7,68.83 14.1,68.83 15.49,68.83 15.49,74.93 16.76,77.22 16.76,75.95 16.76,74.93 16.76,73.79 10.67,59.44 28.45,59.44 18.29,48.01 51.31,55.63 51.31,53.09 51.31,50.55 51.31,48.01 51.31,45.47 48.77,58.17 46.23,58.17 41.15,58.17 38.61,58.17 34.8,58.17 51.31,58.17 57.66,52.07 58.93,52.07 60.2,52.07 61.47,52.07 56.39,52.07 62.74,52.07 62.74,50.8 47.5,72.14 46.23,72.14 44.96,72.14 43.69,72.14 42.42,72.14 51.56,72.14 51.56,73.41 51.56,74.68 51.56,75.95 51.56,77.22 38.61,74.93 38.61,76.2 38.61,73.66 61.98,66.93 61.98,69.47 60.2,70.87 61.98,70.87 58.93,70.87 58.29,69.47 58.29,67.18 63.37,66.93 64.77,66.93 66.04,66.93 66.67,67.95 66.67,68.83 66.8,77.72 65.28,77.72 63.37,77.72 61.85,77.72 60.45,77.72 33.53,56.9
  pour Top (rank 2): 55.12,65.79 32.26,65.79 32.26,78.49 55.12,78.49
  pour Bottom (rank 2): 55.12,65.79 32.26,65.79 32.26,78.49 55.12,78.49
  pour Top (no thermals): 48.89,76.45 49.53,76.45 49.53,75.95 50.42,75.95 50.42,78.49 49.53,78.49 49.53,77.98 48.89,77.98
  pour Top (no thermals): 46.1,77.44 45.08,77.44 45.08,78.23 45.47,78.23 45.47,77.93 46.1,77.93
  pour Top: 6.86,65.79 32.26,65.79 32.26,42.93 6.86,42.93
  pour Bottom: 6.86,65.79 32.26,65.79 32.26,42.93 6.86,42.93
  pour Bottom: 55.12,42.93 32.26,42.93 32.26,65.79 55.12,65.79
  pour Top: 55.12,42.93 32.26,42.93 32.26,65.79 55.12,65.79
  pour Top: 55.12,65.79 67.82,65.79 67.82,42.93 55.12,42.93
  pour Bottom: 55.12,65.79 67.82,65.79 67.82,42.93 55.12,42.93
  pour Top (no thermals): 57.12,44.83 56.91,44.83 56.91,45.23 56.32,45.23 56.32,44.13 56.91,44.13 56.91,44.43 57.12,44.43
  pour Top (no thermals): 57.08,43.73 56.91,43.73 56.91,44.12 56.26,44.12 56.26,43.03 56.91,43.03 56.91,43.33 57.08,43.33
  pour Bottom: 6.86,65.79 6.86,78.49 32.26,78.49 32.26,65.79
  pour Top: 6.86,65.79 6.86,78.49 32.26,78.49 32.26,65.79
  pour Top: 55.12,65.79 55.12,78.49 67.82,78.49 67.82,65.79
  pour Bottom: 55.12,65.79 55.12,78.49 67.82,78.49 67.82,65.79
  pour Top (no thermals): 60.91,43.73 60.91,43.93 61.66,43.93 61.66,43.13 60.91,43.13 60.91,43.28 60.56,43.28 60.56,43.73
  pour Top (no thermals): 64.42,77.23 64.72,77.23 64.72,76.63 65.82,76.63 65.82,77.23 66.22,77.23 66.22,77.43 64.42,77.43
GND2  (via drill 0.3)  (5 unrouted)
  other vias: 50.29,113.28 50.29,112.01 50.29,110.74 50.29,109.47 50.29,108.2 48.77,109.47 47.5,109.47 48.77,108.2 46.23,109.47 44.96,109.47 43.69,109.47 42.29,109.22 41.15,108.2 39.88,108.2 40,109.22 39.24,109.22 44.83,110.74 43.69,110.74 44.83,111.76 43.69,111.76 44.83,113.79 43.69,113.79 42.42,113.79 41.15,113.79 40,112.9 39.24,112.9 18.8,82.8 18.8,80.26 20.07,79.88 20.07,83.44 20.32,84.2 22.35,84.2 22.48,83.44 23.88,81.66 18.8,81.66 23.88,82.8 23.88,80.26 22.61,79.88 42.42,92.96 44.96,92.96 47.5,92.96 50.04,92.96 52.58,92.96 52.58,90.42 52.58,87.88 52.58,85.34 52.58,82.8 52.58,80.26 39.88,92.96 37.34,92.96 36.07,92.96 33.53,85.34 36.07,85.34 36.07,82.8 33.53,82.8 33.53,80.26 36.07,80.26 36.83,89.92 36.83,87.5 33.02,87.38 33.02,90.04 34.8,91.19 34.8,86.36 56.01,80.26 56.01,81.53 56.01,82.8 56.01,84.07 56.01,85.34 56.01,86.49 57.66,86.87 58.93,86.87 60.2,86.87 61.47,86.87 61.72,85.34 61.72,84.07 61.72,82.8 61.72,81.79 63.18,84.45 65.97,84.45 67.11,82.8 65.97,81.15 67.11,81.15 67.11,83.95 61.72,79.63 63.56,79.63 64.83,79.63 66.1,79.88 67.11,79.88 63.18,85.34 64.57,85.47 65.97,85.34 67.11,85.34 7.75,104.9 39.62,113.79 10.29,104.9 10.29,108.33 7.75,108.46 11.43,106.68 11.43,104.9 11.43,108.33 12.7,108.33 14.1,108.33 15.49,108.33 15.49,109.86 15.49,112.01 15.49,113.28 12.7,106.68 14.1,106.68 15.49,106.68 12.7,104.9 14.1,104.9 15.49,104.9 15.49,111 16.76,113.28 16.76,112.01 16.76,111 16.76,109.86 10.67,95.5 28.45,95.5 18.29,84.07 51.31,91.69 51.31,89.15 51.31,86.61 51.31,84.07 51.31,81.53 48.77,94.23 46.23,94.23 41.15,94.23 38.61,94.23 34.8,94.23 51.31,94.23 57.66,88.14 58.93,88.14 60.2,88.14 61.47,88.14 56.39,88.14 62.74,88.14 62.74,86.87 47.5,108.2 46.23,108.2 44.96,108.2 43.69,108.2 42.42,108.2 51.56,108.2 51.56,109.47 51.56,110.74 51.56,112.01 51.56,113.28 38.61,111 38.61,112.27 38.61,109.73 61.98,103 61.98,105.54 60.2,106.93 61.98,106.93 58.93,106.93 58.29,105.54 58.29,103.25 63.37,103 64.77,103 66.04,103 66.67,104.01 66.67,104.9 66.8,113.79 65.28,113.79 63.37,113.79 61.85,113.79 60.45,113.79 33.53,92.96
  pour Top (rank 2): 55.12,101.85 32.26,101.85 32.26,114.55 55.12,114.55
  pour Bottom (rank 2): 55.12,101.85 32.26,101.85 32.26,114.55 55.12,114.55
  pour Top (no thermals): 48.89,112.52 49.53,112.52 49.53,112.01 50.42,112.01 50.42,114.55 49.53,114.55 49.53,114.05 48.89,114.05
  pour Top (no thermals): 46.1,113.51 45.08,113.51 45.08,114.3 45.47,114.3 45.47,114 46.1,114
  pour Top: 6.86,101.85 32.26,101.85 32.26,78.99 6.86,78.99
  pour Bottom: 6.86,101.85 32.26,101.85 32.26,78.99 6.86,78.99
  pour Bottom: 55.12,78.99 32.26,78.99 32.26,101.85 55.12,101.85
  pour Top: 55.12,78.99 32.26,78.99 32.26,101.85 55.12,101.85
  pour Top: 55.12,101.85 67.82,101.85 67.82,78.99 55.12,78.99
  pour Bottom: 55.12,101.85 67.82,101.85 67.82,78.99 55.12,78.99
  pour Top (no thermals): 57.12,80.89 56.91,80.89 56.91,81.29 56.32,81.29 56.32,80.19 56.91,80.19 56.91,80.49 57.12,80.49
  pour Top (no thermals): 57.08,79.79 56.91,79.79 56.91,80.19 56.26,80.19 56.26,79.09 56.91,79.09 56.91,79.39 57.08,79.39
  pour Bottom: 6.86,101.85 6.86,114.55 32.26,114.55 32.26,101.85
  pour Top: 6.86,101.85 6.86,114.55 32.26,114.55 32.26,101.85
  pour Top: 55.12,101.85 55.12,114.55 67.82,114.55 67.82,101.85
  pour Bottom: 55.12,101.85 55.12,114.55 67.82,114.55 67.82,101.85
  pour Top (no thermals): 60.91,79.79 60.91,79.99 61.66,79.99 61.66,79.19 60.91,79.19 60.91,79.34 60.56,79.34 60.56,79.79
  pour Top (no thermals): 64.42,113.29 64.72,113.29 64.72,112.69 65.82,112.69 65.82,113.29 66.22,113.29 66.22,113.49 64.42,113.49
GND3  (via drill 0.3)  (5 unrouted)
  other vias: 50.29,149.35 50.29,148.08 50.29,146.81 50.29,145.54 50.29,144.27 48.77,145.54 47.5,145.54 48.77,144.27 46.23,145.54 44.96,145.54 43.69,145.54 42.29,145.29 41.15,144.27 39.88,144.27 40,145.29 39.24,145.29 44.83,146.81 43.69,146.81 44.83,147.83 43.69,147.83 44.83,149.86 43.69,149.86 42.42,149.86 41.15,149.86 40,148.97 39.24,148.97 18.8,118.87 18.8,116.33 20.07,115.95 20.07,119.51 20.32,120.27 22.35,120.27 22.48,119.51 23.88,117.73 18.8,117.73 23.88,118.87 23.88,116.33 22.61,115.95 42.42,129.03 44.96,129.03 47.5,129.03 50.04,129.03 52.58,129.03 52.58,126.49 52.58,123.95 52.58,121.41 52.58,118.87 52.58,116.33 39.88,129.03 37.34,129.03 36.07,129.03 33.53,121.41 36.07,121.41 36.07,118.87 33.53,118.87 33.53,116.33 36.07,116.33 36.83,125.98 36.83,123.57 33.02,123.44 33.02,126.11 34.8,127.25 34.8,122.43 56.01,116.33 56.01,117.6 56.01,118.87 56.01,120.14 56.01,121.41 56.01,122.56 57.66,122.94 58.93,122.94 60.2,122.94 61.47,122.94 61.72,121.41 61.72,120.14 61.72,118.87 61.72,117.86 63.18,120.52 65.97,120.52 67.11,118.87 65.97,117.22 67.11,117.22 67.11,120.02 61.72,115.7 63.56,115.7 64.83,115.7 66.1,115.95 67.11,115.95 63.18,121.41 64.57,121.54 65.97,121.41 67.11,121.41 7.75,140.97 39.62,149.86 10.29,140.97 10.29,144.4 7.75,144.53 11.43,142.75 11.43,140.97 11.43,144.4 12.7,144.4 14.1,144.4 15.49,144.4 15.49,145.92 15.49,148.08 15.49,149.35 12.7,142.75 14.1,142.75 15.49,142.75 12.7,140.97 14.1,140.97 15.49,140.97 15.49,147.07 16.76,149.35 16.76,148.08 16.76,147.07 16.76,145.92 10.67,131.57 28.45,131.57 18.29,120.14 51.31,127.76 51.31,125.22 51.31,122.68 51.31,120.14 51.31,117.6 48.77,130.3 46.23,130.3 41.15,130.3 38.61,130.3 34.8,130.3 51.31,130.3 57.66,124.21 58.93,124.21 60.2,124.21 61.47,124.21 56.39,124.21 62.74,124.21 62.74,122.94 47.5,144.27 46.23,144.27 44.96,144.27 43.69,144.27 42.42,144.27 51.56,144.27 51.56,145.54 51.56,146.81 51.56,148.08 51.56,149.35 38.61,147.07 38.61,148.34 38.61,145.8 61.98,139.06 61.98,141.61 60.2,143 61.98,143 58.93,143 58.29,141.61 58.29,139.32 63.37,139.06 64.77,139.06 66.04,139.06 66.67,140.08 66.67,140.97 66.8,149.86 65.28,149.86 63.37,149.86 61.85,149.86 60.45,149.86 33.53,129.03
  pour Top (rank 2): 55.12,137.92 32.26,137.92 32.26,150.62 55.12,150.62
  pour Bottom (rank 2): 55.12,137.92 32.26,137.92 32.26,150.62 55.12,150.62
  pour Top (no thermals): 48.89,148.59 49.53,148.59 49.53,148.08 50.42,148.08 50.42,150.62 49.53,150.62 49.53,150.11 48.89,150.11
  pour Top (no thermals): 46.1,149.58 45.08,149.58 45.08,150.37 45.47,150.37 45.47,150.06 46.1,150.06
  pour Top: 6.86,137.92 32.26,137.92 32.26,115.06 6.86,115.06
  pour Bottom: 6.86,137.92 32.26,137.92 32.26,115.06 6.86,115.06
  pour Bottom: 55.12,115.06 32.26,115.06 32.26,137.92 55.12,137.92
  pour Top: 55.12,115.06 32.26,115.06 32.26,137.92 55.12,137.92
  pour Top: 55.12,137.92 67.82,137.92 67.82,115.06 55.12,115.06
  pour Bottom: 55.12,137.92 67.82,137.92 67.82,115.06 55.12,115.06
  pour Top (no thermals): 57.12,116.96 56.91,116.96 56.91,117.36 56.32,117.36 56.32,116.26 56.91,116.26 56.91,116.56 57.12,116.56
  pour Top (no thermals): 57.08,115.86 56.91,115.86 56.91,116.25 56.26,116.26 56.26,115.16 56.91,115.16 56.91,115.46 57.08,115.46
  pour Bottom: 6.86,137.92 6.86,150.62 32.26,150.62 32.26,137.92
  pour Top: 6.86,137.92 6.86,150.62 32.26,150.62 32.26,137.92
  pour Top: 55.12,137.92 55.12,150.62 67.82,150.62 67.82,137.92
  pour Bottom: 55.12,137.92 55.12,150.62 67.82,150.62 67.82,137.92
  pour Top (no thermals): 60.91,115.86 60.91,116.06 61.66,116.06 61.66,115.26 60.91,115.26 60.91,115.41 60.56,115.41 60.56,115.86
  pour Top (no thermals): 64.42,149.36 64.72,149.36 64.72,148.76 65.82,148.76 65.82,149.36 66.22,149.36 66.22,149.56 64.42,149.56
N$1  (via drill 1.02 pad 1.65)
  other vias: 39.88,30.99
N$2
  Top 0.203: 61.34,44.58 61.34,44.59 61.31,44.62
  Top 0.483: 61.31,44.62 Y9.FEED
  Top 0.879: R2.2 61.34,44.58
N$3  (via drill 1.02 pad 1.65)
  other vias: 42.42,67.06
N$4  (via drill 1.02 pad 1.65)
  other vias: 36.07,59.44
N$5
  Top 0.203: 61.34,8.51 61.34,8.52 61.31,8.55
  Top 0.483: 61.31,8.55 Y4.FEED
  Top 0.879: R1.2 61.34,8.51
N$6  (via drill 1.02 pad 1.65)
  other vias: 33.53,59.44
N$7  (via drill 1.02 pad 1.65)
  other vias: 18.29,69.6
N$8  (via drill 1.02 pad 1.65)
  other vias: 14.48,10.67
N$9  (via drill 1.02 pad 1.65)
  other vias: 14.48,44.2
N$10  (via drill 1.02 pad 1.65)
  other vias: 56.39,33.53
N$11  (via drill 1.02 pad 1.65)
  other vias: 56.39,30.99
N$12  (via drill 1.02 pad 1.65)
  other vias: 14.48,46.74
N$13  (via drill 1.02 pad 1.65)
  other vias: 18.29,33.53
N$14  (via drill 1.02 pad 1.65)
  other vias: 14.48,8.13
N$15  (via drill 1.02 pad 1.65)
  other vias: 39.88,67.06
N$16  (via drill 1.02 pad 1.65)
  other vias: 62.74,18.29
N$17  (via drill 1.02 pad 1.65)
  other vias: 66.55,18.29
N$18  (via drill 1.02 pad 1.65)
  other vias: 42.42,30.99
N$19  (via drill 1.02 pad 1.65)
  other vias: 36.07,23.37
N$20  (via drill 1.02 pad 1.65)
  other vias: 33.53,23.37
N$21  (via drill 1.02 pad 1.65)
  other vias: 56.39,69.6
N$22  (via drill 1.02 pad 1.65)
  other vias: 56.39,67.06
N$23  (via drill 1.02 pad 1.65)
  other vias: 62.74,54.36
N$24  (via drill 1.02 pad 1.65)
  other vias: 66.55,54.36
N$25
  Top 0.203: 61.34,80.65 61.34,80.66 61.31,80.69
  Top 0.483: 61.31,80.69 Y15.FEED
  Top 0.879: R3.2 61.34,80.65
N$26  (via drill 1.02 pad 1.65)
  other vias: 42.42,103.12
N$27  (via drill 1.02 pad 1.65)
  other vias: 36.07,95.5
N$28  (via drill 1.02 pad 1.65)
  other vias: 33.53,95.5
N$29  (via drill 1.02 pad 1.65)
  other vias: 18.29,105.66
N$30  (via drill 1.02 pad 1.65)
  other vias: 14.48,80.26
N$31  (via drill 1.02 pad 1.65)
  other vias: 14.48,82.8
N$32  (via drill 1.02 pad 1.65)
  other vias: 39.88,103.12
N$33  (via drill 1.02 pad 1.65)
  other vias: 56.39,105.66
N$34  (via drill 1.02 pad 1.65)
  other vias: 56.39,103.12
N$35  (via drill 1.02 pad 1.65)
  other vias: 62.74,90.42
N$36  (via drill 1.02 pad 1.65)
  other vias: 66.55,90.42
N$37
  Top 0.203: 61.34,116.71 61.34,116.73 61.31,116.76
  Top 0.483: 61.31,116.76 Y21.FEED
  Top 0.879: R4.2 61.34,116.71
N$38  (via drill 1.02 pad 1.65)
  other vias: 42.42,139.19
N$39  (via drill 1.02 pad 1.65)
  other vias: 36.07,131.57
N$40  (via drill 1.02 pad 1.65)
  other vias: 33.53,131.57
N$41  (via drill 1.02 pad 1.65)
  other vias: 18.29,141.73
N$42  (via drill 1.02 pad 1.65)
  other vias: 14.48,116.33
N$43  (via drill 1.02 pad 1.65)
  other vias: 14.48,118.87
N$44  (via drill 1.02 pad 1.65)
  other vias: 39.88,139.19
N$45  (via drill 1.02 pad 1.65)
  other vias: 56.39,141.73
N$46  (via drill 1.02 pad 1.65)
  other vias: 56.39,139.19
N$47  (via drill 1.02 pad 1.65)
  other vias: 62.74,126.49
N$48  (via drill 1.02 pad 1.65)
  other vias: 66.55,126.49

## Text on the board
Bottom: V10 | V10 | V10 | V10
Milling: v-score | v-score | v-score | v-score | v-score | v-score | v-score | v-score | v-score | v-score | v-score | v-score | v-score